# EAGLE board sparrow_ble_mic (EAGLE 6.5.0)
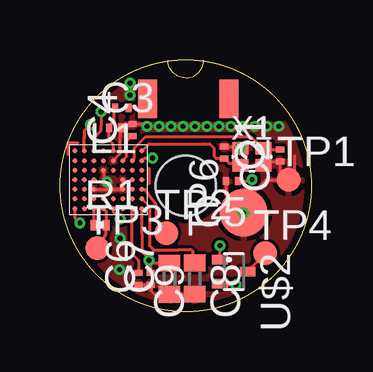
[diagram p0: board, top side]
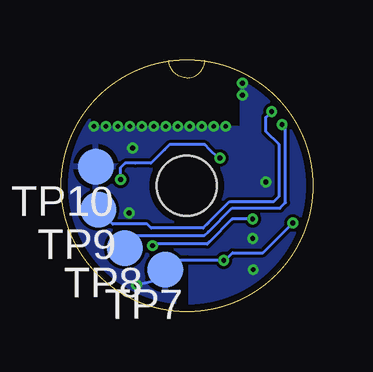
[diagram p1: board, bottom side, seen from below]

Size 10.5 x 10.5 mm. Coordinates in mm from the lower left corner, seen from the top.
Outline: 6,10.5 arc-90 5.25,9.75 arc-90 4.5,10.5
Outline: circle at 5.25,5.25 radius 5.25
Copper layers (1+2*15+16): Top 0.035mm / dielectric 0.38mm / Route2 0.035mm / dielectric 0.71mm / Route15 0.035mm / dielectric 0.38mm / Bottom 0.035mm
Design rules "PCB-POOL HighSpec_ML4": minimum track width 0.125mm, minimum drill 0.2mm, track to track 0.125mm, track to pad 0.125mm, pad to pad 0.125mm, via to via 0.125mm, smd to smd 0.125mm, copper to edge 0.3mm, drill to drill 0.2mm, minimum pad ring 0.2mm, minimum via ring 0.125mm, stop-mask expansion 0.075mm, vias tented up to drill 0mil, thermal gap 0.2mm
Net classes: 1 power: width 0.61 mm
Holes 2.5 mm at 5.25,5.25
tRestrict: area 3.4,7.9 to 9.3,10.4
bRestrict: area 3,7.8 to 9.2,10.2; area 5.2,-0.7 to 5.7,2.4

## Footprints (pad centres in the part's own frame; a part is rotated, then mirrored left to right if it is on the bottom)
C0201 = smd 0.25 x 0.35: 1 -0.25,0; 2 0.25,0
C0402 = smd 0.7 x 0.9: 1 -0.65,0; 2 0.65,0
NRF52832_WLCSP = smd 0.2 x 0.2: A1 -1.2,1.4; A2 -0.8,1.4; A3 -0.4,1.4; A4 0,1.4; A5 0.4,1.4; A6 0.8,1.4; A7 1.2,1.4; B2 -0.8,1; B3 -0.4,1; B4 0,1; B5 0.4,1; B6 0.8,1; B7 1.2,1; C2 -0.8,0.6; C3 -0.4,0.6; C4 0,0.6; C5 0.4,0.6; C6 0.8,0.6; C7 1.2,0.6; D1 -1.2,0.2; D2 -0.8,0.2; D3 -0.4,0.2; D6 0.8,0.2; D7 1.2,0.2; E1 -1.2,-0.2; E2 -0.8,-0.2; E3 -0.4,-0.2; E6 0.8,-0.2; E7 1.2,-0.2; F1 -1.2,-0.6; F2 -0.8,-0.6; F3 -0.4,-0.6; F4 0,-0.6; F5 0.4,-0.6; F6 0.8,-0.6; F7 1.2,-0.6; G1 -1.2,-1; G2 -0.8,-1; G3 -0.4,-1; G4 0,-1; G5 0.4,-1; G6 0.8,-1; G7 1.2,-1; H1 -1.2,-1.4; H2 -0.8,-1.4; H3 -0.4,-1.4; H4 0,-1.4; H5 0.4,-1.4; H6 0.8,-1.4; H7 1.2,-1.4
L0201 = smd 0.25 x 0.35: 1 -0.275,0; 2 0.275,0
R0201 = smd 0.28 x 0.43: 1 -0.255,0; 2 0.255,0
TP10R = smd 1 x 1: TP 0,0
TP20R = smd 2 x 2: TP 0,0
TP15R = smd 1.5 x 1.5: TP 0,0
SC75_INFINEON = smd 0.4 x 0.65: 1 -0.5,-0.575; 2 0.5,-0.575; 3 0,0.575
2450AT18A100 = smd 0.8 x 1.6: P$1 -2,0; P$2 1.4,0
M416 = smd 0.67 x 0.52: 1 -0.485,-0.36; 2 0.485,-0.36; 3 0.485,0.36; 4 -0.485,0.36

## Placement (x,y rotation side)
C1  12pF  [C0201]  9.18,6.51 90 top
C2  12pF  [C0201]  6.86,6.63 270 top
C3  1pF  [C0201]  2.3,7.66 0 top
C4  100pF  [C0201]  3.03,7.57 90 top
C5  100pF  [C0201]  7.18,5.45 180 top
C6  100nF  [C0201]  3.78,1.37 90 top
C7  4.7uF  [C0402]  4.57,1.37 90 top
C8  1uF  [C0402]  5.63,1.38 270 top
C9  100nF  [C0201]  3.28,1.37 270 top
IC2  [NRF52832_WLCSP]  2.02,5.5 270 top
L1  3.3nH  [L0201]  2.58,8.5 180 top
R1  33K  [R0201]  1.67,3.61 0 top
TP1  TPTP10R  [TP10R]  9.55,5.5 0 top
TP2  TPTP10R  [TP10R]  4.43,3.28 0 top
TP3  TPTP10R  [TP10R]  1.57,2.65 0 top
TP4  TPTP10R  [TP10R]  8.57,2.43 0 top
TP6  TPTP20R  [TP20R]  7.67,4.13 90 top
TP7  TPTP15R  [TP15R]  6.15,1.75 180 bottom
TP8  TPTP15R  [TP15R]  7.85,2.65 180 bottom
TP9  TPTP15R  [TP15R]  8.95,4.25 180 bottom
TP10  TPTP15R  [TP15R]  9.05,6.05 180 bottom
U$2  SI1013  [SC75_INFINEON]  7.25,1.67 270 top
U$3  2450AT18A100  [2450AT18A100]  5.65,8.88 0 top
X1  416F32022CKR  [M416]  8.01,6.46 0 top

## Library data of the parts
C1-C9 L1 R1 = rcl
IC2 U$3 = dan
TP1-TP4 TP6-TP10 = testpad
U$2 = smartwatch
X1 = crystals; DIGIKEY: CTX1407CT-ND

## Nets
3.3V: C6.2 C7.2 IC2.A7 IC2.H7 TP7.TP U$2.2
AIN0: IC2.C6
AIN1: IC2.D6
AIN2: IC2.E6
AIN3: IC2.E7 R1.2 TP3.TP
AIN4: IC2.A3
AIN5: IC2.A4
AIN6: IC2.A5 TP2.TP
AIN7: IC2.B5
GND: C1.1 C2.1 C3.2 C4.2 C5.2 C6.1 C7.1 C8.2 C9.2 IC2.C4 IC2.C5 IC2.D2 IC2.E3 IC2.F5 TP1.TP TP6.TP TP10.TP X1.2 X1.4
HON: IC2.F7 R1.1
N$1: IC2.H1
N$2: C2.2 IC2.A1 X1.1
N$5: TP4.TP U$2.3
N$6: C1.2 IC2.B2 X1.3
N$9: C4.1 IC2.C2
N$10: C5.1 IC2.A2
N$12: C3.1 IC2.D1 L1.2
N$13: L1.1 U$3.P$1
N$19: C9.1 IC2.B7
N$20: C8.1 IC2.A6
SON: IC2.D7 U$2.1
SWDCLK: IC2.F1 TP9.TP
SWDIO: IC2.G1 TP8.TP

## Tracks (layer width: path | path; a pad name or v marks a point on that pad's centre or on a via)
3.3V  (via drill 0.2)
  Top 0.125: IC2.A7 | U$2.2 6.89,1.11 v7.35,1.11 | 3.42,3.84 IC2.A7 | IC2.A7 3.42,3.22 3.42,2.5 3.59,2.33 | 3.59,2.33 3.79,2.13 | 3.79,2.13 C6.2 | 3.9,2.02 C7.2 3.9,2.02 | 3.9,2.02 3.79,2.13 | 3.9,2.02 3.59,2.33 | 3.59,2.33 3.72,2.23 v3.72,2.14 | IC2.H7 0.62,3.91 v0.83,3.7
  Bottom 0.125: v7.35,1.11 6.15,1.4 TP7.TP 5.86,2.14 v3.72,2.14 3.66,2.14 3.35,2.45 2.08,2.45 v0.83,3.7
  pour Bottom: 5.7,1.5 8.78,1.5 8.78,0.72 8.78,-0.24 5.68,-0.24 5.68,1.51
AIN3
  Top 0.125: IC2.E7 1.92,4.2 R1.2 1.92,3.23 TP3.TP
AIN6
  Top 0.125: TP2.TP 4.43,3.45 4.03,3.85 4.03,4.42 3.94,4.56 3.89,4.64 3.66,4.95 3.56,5.1 IC2.A5
GND  (via drill 0.2)
  Top 0.125: C2.1 7.09,6.88 7.46,6.88 X1.4 | X1.2 8.6,6.26 C1.1 9.18,5.87 | C9.2 C6.1 3.8,1.1 3.8,0.87 3.95,0.72 C7.1 C8.2 | IC2.F5 2.11,5.1 | 2.11,5.1 2.14,5.1 | 2.14,5.1 IC2.C5 | IC2.C4 IC2.C5 | IC2.E3 1.82,5.56 2.11,5.27 2.11,5.1 | IC2.C5 2.14,5.1 | 2.14,5.1 2.11,5.13 v1.96,5.41 | 7.46,4.34 TP6.TP 7.33,4.47 | 6.92,4.91 C5.2 6.92,4.91 | 6.92,4.91 6.92,4.88 | 6.92,4.88 7.33,4.47 | 9.18,5.87 TP1.TP 8.59,5.49 7.57,4.47 7.33,4.47 | v3.63,7.73 3.54,7.82 C4.2 2.71,7.82 C3.2 2.51,7.7 2.51,7.3 2.51,6.59 IC2.D2 | 9.18,5.87 9.18,5.83 9.53,5.48 9.3,5.48 9.28,5.5 | 9.18,5.87 9.8,5.87 9.8,6.5 | 6.92,4.91 6.92,4.88 | 6.92,4.88 7.33,4.47
  Bottom 0.125: TP10.TP 9.05,5.84
  other vias: 4.13,7.73 4.63,7.73 5.13,7.73 5.63,7.73 6.13,7.73 6.63,7.73 7.13,7.73 7.63,7.73 7.66,4.12 2.49,1.75 2.51,3.05 7.52,6.82 8.13,7.73 8.63,7.73 9.13,7.73 2.93,9.03 2.93,9.53
  pour Top: 3.35,11.79 14.27,11.79 14.2,-0.46 -1.31,-0.46 -1.24,11.8
  pour Bottom: 11.89,14.11 11.36,-1.17 -2.24,-1.17 -1.74,14.08
HON
  Top 0.125: IC2.F7 R1.1
N$2
  Top 0.125: IC2.A1 3.71,6.99 6.02,6.99 6.26,6.99 6.44,6.81 6.44,6.47 6.53,6.38 C2.2 7.07,6.17 7.46,6.17 X1.1
N$3
  Top 0.125: 0.75,7.04 0.39,7.04
N$4
  Top 0.125: 0.35,7.04 0.33,7.04 0.33,6.56
N$5
  Top 0.125: U$2.3 8.57,2.42 TP4.TP
N$6
  Top 0.125: C1.2 8.62,6.76 X1.3 8.38,6.88 7.96,7.3 5.17,7.3 3.58,7.3 3.56,7.28 3.11,6.83 3.11,6.39 IC2.B2
N$7
  Top 0.125: 3.71,5.98 3.71,5.33
N$9
  Top 0.125: IC2.C2 2.79,6.47 2.79,7.11 3,7.32 C4.1
N$10  (via drill 0.2)
  Top 0.125: IC2.A2 3.52,6.4 v3.87,6.4 | C5.1 7.96,5.45 v8.02,5.51
  Bottom 0.125: 7.97,5.56 v8.02,5.51 v8.03,5.52 8.03,5.99 7.83,6.19 7.41,6.19 6.75,6.19 6.18,6.76 5.98,6.96 4.5,6.96 4.3,6.76 3.94,6.4 v3.87,6.4
N$12
  Top 0.125: IC2.D1 2.23,6.96 2.05,7.14 C3.1 2.05,7.75 2.27,7.97 2.27,8.46 L1.2
N$13
  Top 0.125: 3.67,8.51 3.64,8.54 | 3.64,8.54 U$3.P$1 | L1.1 2.9,8.54 3.64,8.54
N$19
  Top 0.125: 3.01,4.02 IC2.B7 3.02,3.32 3.02,2.77 3.02,2.4 3.28,2.14 C9.1
N$20
  Top 0.125: C8.1 5.56,2.1 5.56,2.49 5.48,2.57 4.93,2.57 3.92,2.57 3.89,2.6 3.84,2.65 3.73,2.76 3.73,3.2 3.73,4.04 3.73,4.4 3.72,4.41 IC2.A6
SON  (via drill 0.2)
  Top 0.125: U$2.1 v6.68,2.75 | IC2.D7 2.22,4.15 v2.51,3.86
  Bottom 0.125: v6.68,2.75 6.64,2.82 4.41,2.82 4.38,2.85 4.32,2.91 3.37,3.86 v2.51,3.86
SWDCLK  (via drill 0.2)
  Top 0.125: IC2.F1 1.43,7.21 1.43,7.27 1.71,7.55 1.71,7.76 v1.71,8.35 v1.72,8.34
  Bottom 0.125: TP9.TP 8.6,3.9 | 8.6,3.9 8.39,3.69 | v1.72,8.34 1.96,8.1 1.96,7.52 1.4,6.96 1.4,4.82 1.63,4.59 3.47,4.59 4.37,3.69 4.41,3.65 4.58,3.48 6.74,3.48 6.91,3.65 8.35,3.65 8.6,3.9
SWDIO  (via drill 0.2)
  Top 0.125: IC2.G1 1.02,7.21 | 1.02,7.21 1.02,7.3 | v1.28,7.8 1.02,7.56 1.02,7.21
  Bottom 0.125: 1.26,7.75 v1.28,7.8 | 1.35,7.8 v1.28,7.8 | v1.28,7.8 1.14,7.68 1.14,4.55 1.37,4.32 3.37,4.32 4.36,3.33 4.53,3.16 7.34,3.16 TP8.TP